# EAGLE board RomWriter (EAGLE 7.2.0)
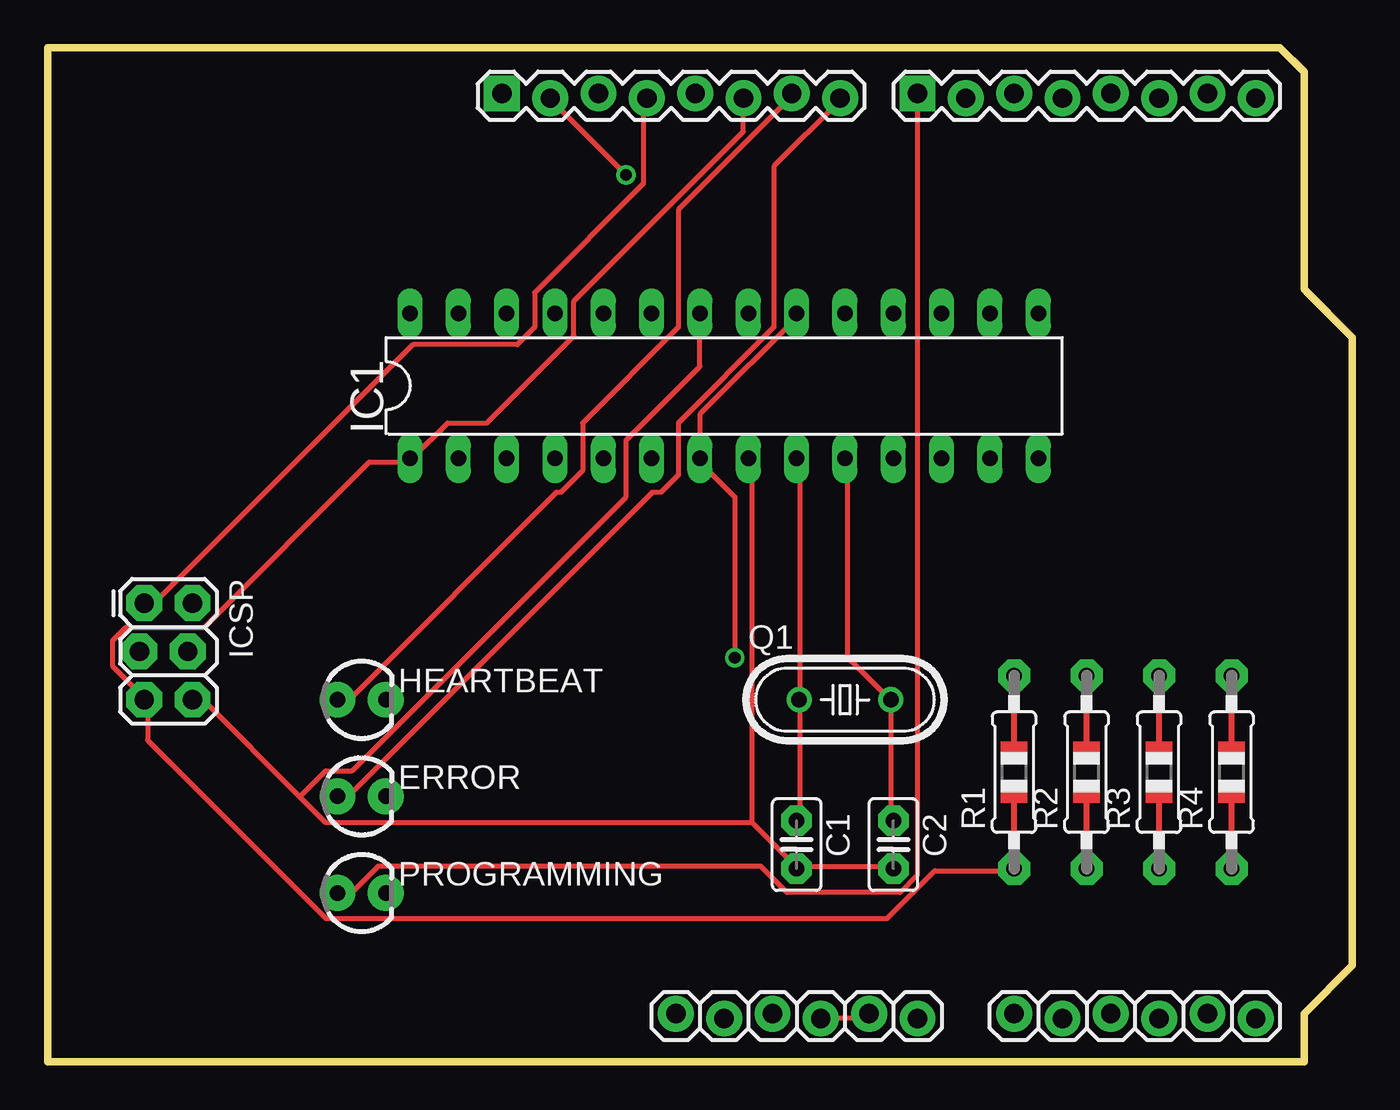
[diagram p0: board, top side]
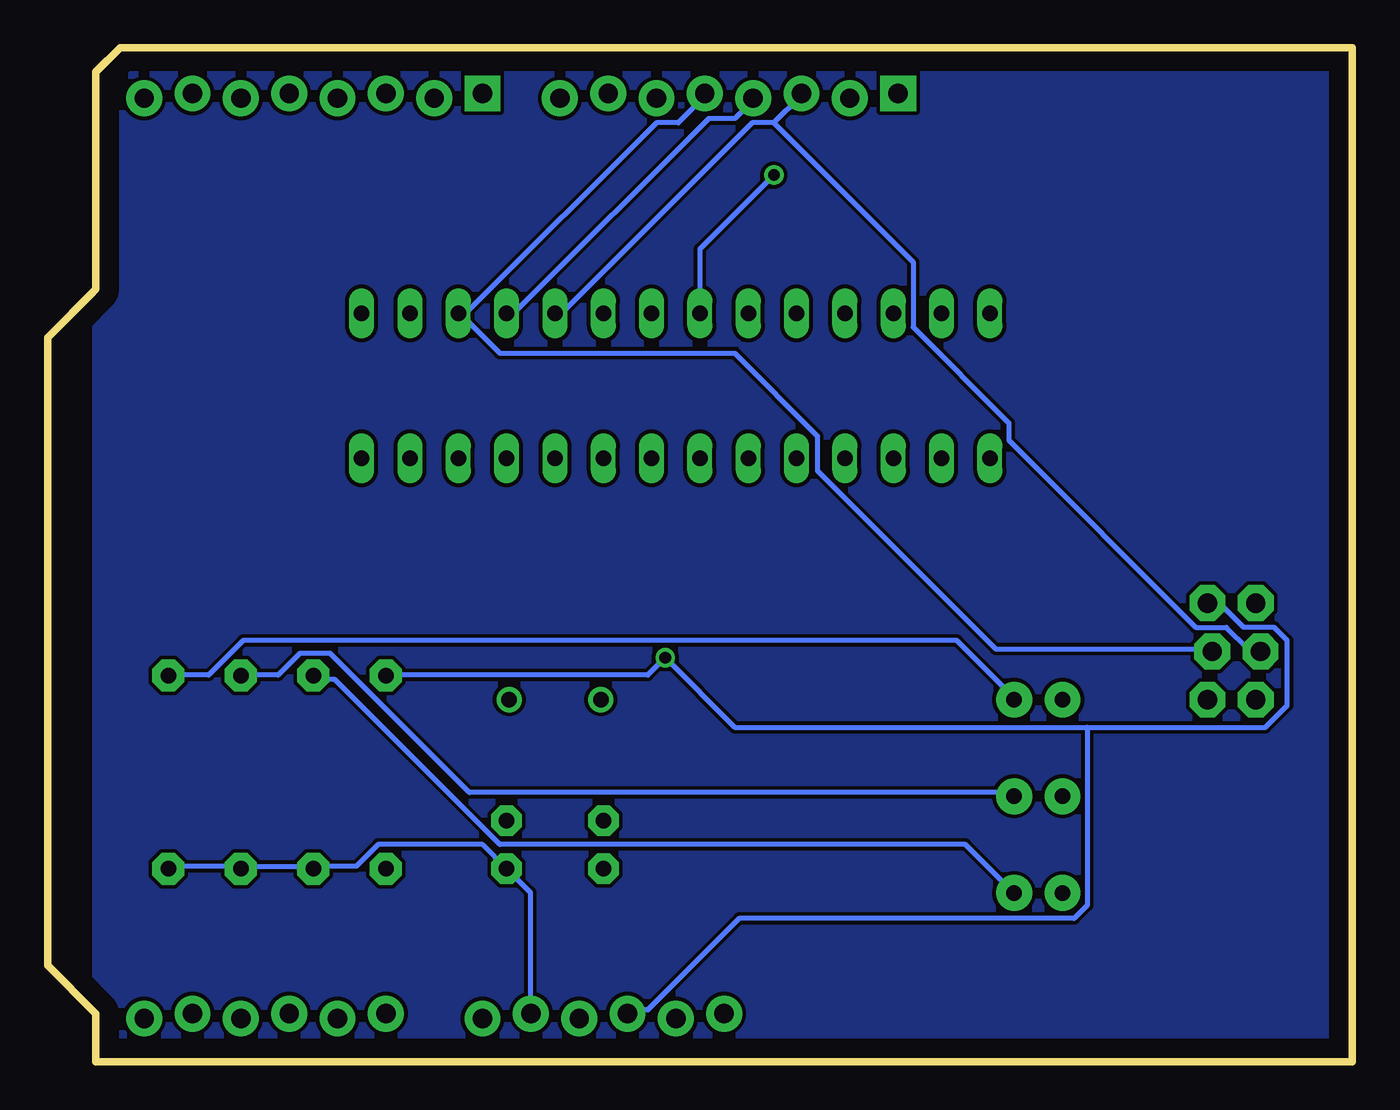
[diagram p1: board, bottom side, seen from below]

Size 68.58 x 53.34 mm. Coordinates in mm from the lower left corner, seen from the top.
Outline: 0,0 66.04,0 66.04,2.54 68.58,5.08 68.58,38.1 66.04,40.64 66.04,52.07 64.77,53.34 0,53.34 0,0
Copper layers (1*16): Top 0.035mm / dielectric 1.5mm / Bottom 0.035mm
Design rules "default": minimum track width 10mil, minimum drill 24mil, track to track 8mil, track to pad 8mil, pad to pad 8mil, via to via 8mil, smd to smd 8mil, copper to edge 40mil, drill to drill 8mil, minimum pad ring 10mil, minimum via ring 8mil, stop-mask expansion 4mil, vias tented up to drill 0mil, thermal gap 10mil

## Footprints (pad centres in the part's own frame; a part is rotated, then mirrored left to right if it is on the bottom)
C2.5-2 = drill 0.813 pad 1.6 octagon: 1 -1.27,0; 2 1.27,0
LED3MM = drill 0.813 pad 1.88: A -1.27,0; K 1.27,0
DIL28-3 = drill 0.813 long: 1 -16.51,-3.81; 2 -13.97,-3.81; 3 -11.43,-3.81; 4 -8.89,-3.81; 5 -6.35,-3.81; 6 -3.81,-3.81; 7 -1.27,-3.81; 8 1.27,-3.81; 9 3.81,-3.81; 10 6.35,-3.81; 11 8.89,-3.81; 12 11.43,-3.81; 13 13.97,-3.81; 14 16.51,-3.81; 15 16.51,3.81; 16 13.97,3.81; 17 11.43,3.81; 18 8.89,3.81; 19 6.35,3.81; 20 3.81,3.81; 21 1.27,3.81; 22 -1.27,3.81; 23 -3.81,3.81; 24 -6.35,3.81; 25 -8.89,3.81; 26 -11.43,3.81; 27 -13.97,3.81; 28 -16.51,3.81
2X3_LOCK = drill 1.016 pad 1.88 octagon: 1 0,0; 2 0,2.54; 3 2.54,-0.254; 4 2.54,2.286; 5 5.08,0; 6 5.08,2.54
HC49/S = drill 0.813: 1 -2.413,0; 2 2.413,0
0805-THM = drill 0.813 pad 1.676 octagon: 1 -5.08,0; 2 5.08,0
ARDUINO_SHIELD = drill 1.016 pad 1.88: 3V 35.56,2.286; 5V 38.1,2.54; A0 50.8,2.54; A1 53.34,2.286; A2 55.88,2.54; A3 58.42,2.286; A4 60.96,2.54; A5 63.5,2.286; D0 63.5,50.673; D1 60.96,50.927; D2 58.42,50.673; D3 55.88,50.927; D4 53.34,50.673; D5 50.8,50.927; D6 48.26,50.673; D8 41.656,50.673; D9 39.116,50.927; D10 36.576,50.673; D11 34.036,50.927; D12 31.496,50.673; D13 28.956,50.927; GND 26.416,50.673; GND1 43.18,2.54; GND2 40.64,2.286; RESET 33.02,2.54; VIN 45.72,2.286 | drill 1.016 pad 1.88 square: AREF 23.876,50.927; D7 45.72,50.927

## Placement (x,y rotation side)
C1  22pf  [C2.5-2]  39.37,11.43 270 top
C2  22pf  [C2.5-2]  44.45,11.43 270 top
ERROR  [LED3MM]  16.51,13.97 0 top
HEARTBEAT  [LED3MM]  16.51,19.05 0 top
IC1  ATMEGA168-20P  [DIL28-3]  35.56,35.56 0 top
ICSP  AVR_SPI_PRG_62X3_LOCK  [2X3_LOCK]  5.08,24.13 270 top
PROGRAMMING  [LED3MM]  16.51,8.89 0 top
Q1  [HC49/S]  41.91,19.05 0 top
R1  [0805-THM]  50.8,15.24 90 top
R2  1kΩ  [0805-THM]  54.61,15.24 90 top
R3  1kΩ  [0805-THM]  58.42,15.24 90 top
R4  1kΩ  [0805-THM]  62.23,15.24 90 top
U$1  ARDUINO_SHIELD_VER2  [ARDUINO_SHIELD]  0,0 0 top

## Library data of the parts
C1 C2 = capacitor-wima
ERROR HEARTBEAT PROGRAMMING = SparkFun-LED
IC1 ICSP U$1 = mylib
Q1 = adafruit; OC_FARNELL: 1667008; OC_NEWARK: unknown
R1-R4 = adafruit

## Nets
3V: U$1.3V
+5V: IC1.7 IC1.20 ICSP.2 R1.2 U$1.5V
ERR_LED: ERROR.A U$1.D8
GND: C1.2 C2.2 IC1.8 IC1.22 ICSP.6 R2.1 R3.1 R4.1 U$1.GND U$1.GND1 U$1.GND2
HEART_LED: HEARTBEAT.A U$1.D9
MISO: IC1.18 ICSP.1 U$1.D12
MOSI: IC1.17 ICSP.4 U$1.D11
N$6: PROGRAMMING.K R2.2
N$7: ERROR.K R3.2
N$8: HEARTBEAT.K R4.2
PGM_LED: PROGRAMMING.A U$1.D7
RESET: IC1.1 ICSP.5 R1.1 U$1.D10
SCK: IC1.19 ICSP.3 U$1.D13
VIN: U$1.VIN
XTAL1: C1.1 IC1.9 Q1.1
XTAL2: C2.1 IC1.10 Q1.2

## Tracks (layer width: path | path; a pad name or v marks a point on that pad's centre or on a via)
+5V  (via drill 0.61)
  Top 0.254: IC1.20 39.55,39.32 34.29,34.06 IC1.7 34.29,31.55 36.12,29.72 v36.12,21.26
  Bottom 0.254: R1.2 50.75,20.34 37.03,20.34 v36.12,21.26 32.46,17.6 13.95,17.6 | 13.95,17.6 4.57,17.6 3.43,18.75 3.43,22.17 4.12,22.86 5.71,22.86 6.86,24 7.54,24 ICSP.2 | 13.95,17.6 13.95,8.23 14.63,7.54 32.23,7.54 37.03,2.74 37.95,2.74 U$1.5V
ERR_LED
  Top 0.254: ERROR.A 15.32,14.17 16,14.17 31.77,29.95 32.23,29.95 33.15,30.86 33.15,33.6 38.18,38.63 38.18,47.09 41.6,50.52 U$1.D8
GND  (via drill 0.61)
  Top 0.254: v30.4,46.63 26.52,50.52 U$1.GND | U$1.GND2 42.75,2.29 42.98,2.52 U$1.GND1 | 37.03,12.57 37.03,31.55 IC1.8 | 37.03,12.57 39.32,10.29 C1.2 39.55,10.29 44.35,10.29 C2.2 | 13.26,13.95 14.63,12.57 37.03,12.57 | 13.26,13.95 8.23,18.97 7.77,18.97 ICSP.6 | IC1.22 34.29,36.58 30.4,32.69 30.4,29.72 16,15.32 14.63,15.32 13.26,13.95
  Bottom 0.254: IC1.22 34.29,42.75 v30.4,46.63 | R4.1 62.18,10.29 58.52,10.29 R3.1 58.29,10.29 54.63,10.29 R2.1 54.41,10.29 52.35,10.29 51.21,11.43 45.72,11.43 C2.2 43.2,8.91 43.2,2.74 U$1.GND1
HEART_LED
  Top 0.254: HEARTBEAT.A 15.32,19.2 16,19.2 26.75,29.95 26.98,29.95 28.12,31.09 28.12,33.6 33.15,38.63 33.15,44.81 39.09,50.75 U$1.D9
MISO
  Top 0.254: ICSP.1 5.26,24.23 5.71,24.23 19.2,37.72 24.69,37.72 25.6,38.63 25.6,40.46 31.32,46.18 31.32,50.52 U$1.D12
  Bottom 0.254: IC1.18 44.35,39.55 43.89,39.55 33.83,49.61 32.46,49.61 31.55,50.52 U$1.D12
MOSI
  Bottom 0.254: U$1.D11 34.06,50.75 35.43,49.38 36.58,49.38 46.41,39.55 46.86,39.55 IC1.17 46.86,39.32 44.81,37.26 32.46,37.26 28.12,32.92 28.12,31.09 18.75,21.72 7.54,21.72 ICSP.4
N$1
  pour Bottom: 0,53.34 66.04,53.34 66.04,0 0,0
N$6
  Bottom 0.254: R2.2 54.41,20.12 53.49,20.12 44.81,11.43 20.34,11.43 17.83,8.91 PROGRAMMING.K
N$7
  Bottom 0.254: R3.2 58.29,20.34 56.46,20.34 55.32,21.49 53.72,21.49 46.41,14.17 17.83,14.17 ERROR.K
N$8
  Bottom 0.254: R4.2 62.18,20.34 60.12,20.34 58.29,22.17 20.8,22.17 17.83,19.2 HEARTBEAT.K
PGM_LED
  Top 0.254: U$1.D7 45.72,9.83 44.81,8.91 38.86,8.91 37.49,10.29 17.37,10.29 16,8.91 15.32,8.91 PROGRAMMING.A
RESET
  Top 0.254: R1.1 50.75,10.06 46.63,10.06 44.12,7.54 14.63,7.54 5.26,16.92 5.26,18.97 ICSP.5 5.03,19.2 3.43,20.8 3.43,22.17 4.12,22.86 8.23,22.86 16.92,31.55 18.97,31.55 IC1.1 19.2,31.77 21.03,33.6 23.09,33.6 27.66,38.18 27.66,40.01 36.58,48.92 U$1.D10
SCK
  Bottom 0.254: 30.4,49.38 31.55,49.38 41.38,39.55 41.83,39.55 IC1.19 | 30.4,49.38 29.03,50.75 U$1.D13 | 30.4,49.38 23.09,42.06 23.09,38.63 18.06,33.6 18.06,32.69 8.23,22.86 6.63,22.86 5.49,21.72 5.03,21.72 ICSP.3
XTAL1
  Top 0.254: C1.1 39.55,12.8 39.55,18.97 Q1.1 39.55,19.2 39.55,31.55 IC1.9
XTAL2
  Top 0.254: C2.1 44.35,12.8 44.35,18.97 Q1.2 44.12,19.2 42.06,21.26 42.06,31.55 IC1.10